# Altium PCB ESC.PcbDoc
Units mm, origin at the board's own origin, x right, y up, seen from the top; angles counter-clockwise.
Board outline 52.2 x 30.2 mm, 4 copper layers (Top Layer, Layer 1, Layer 2, Bottom Layer), stack 0.602 mm thick; 62 components, 53 nets, 202 pads, 167 vias.
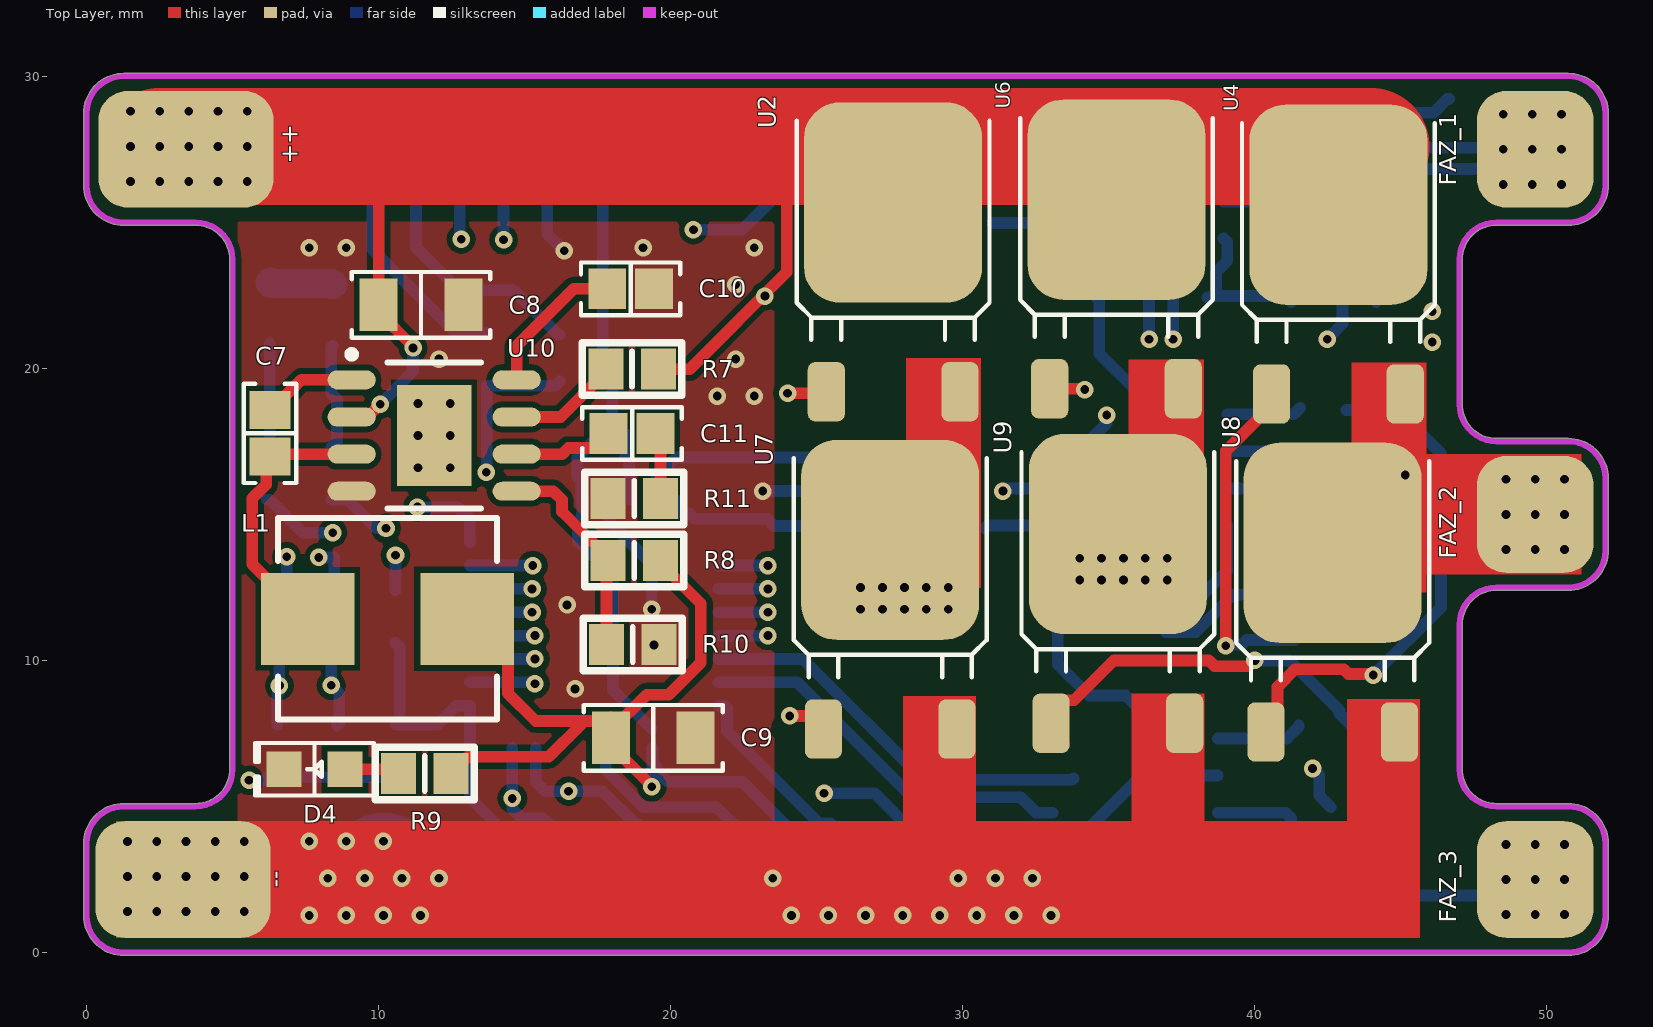
[diagram p0: Top Layer view]
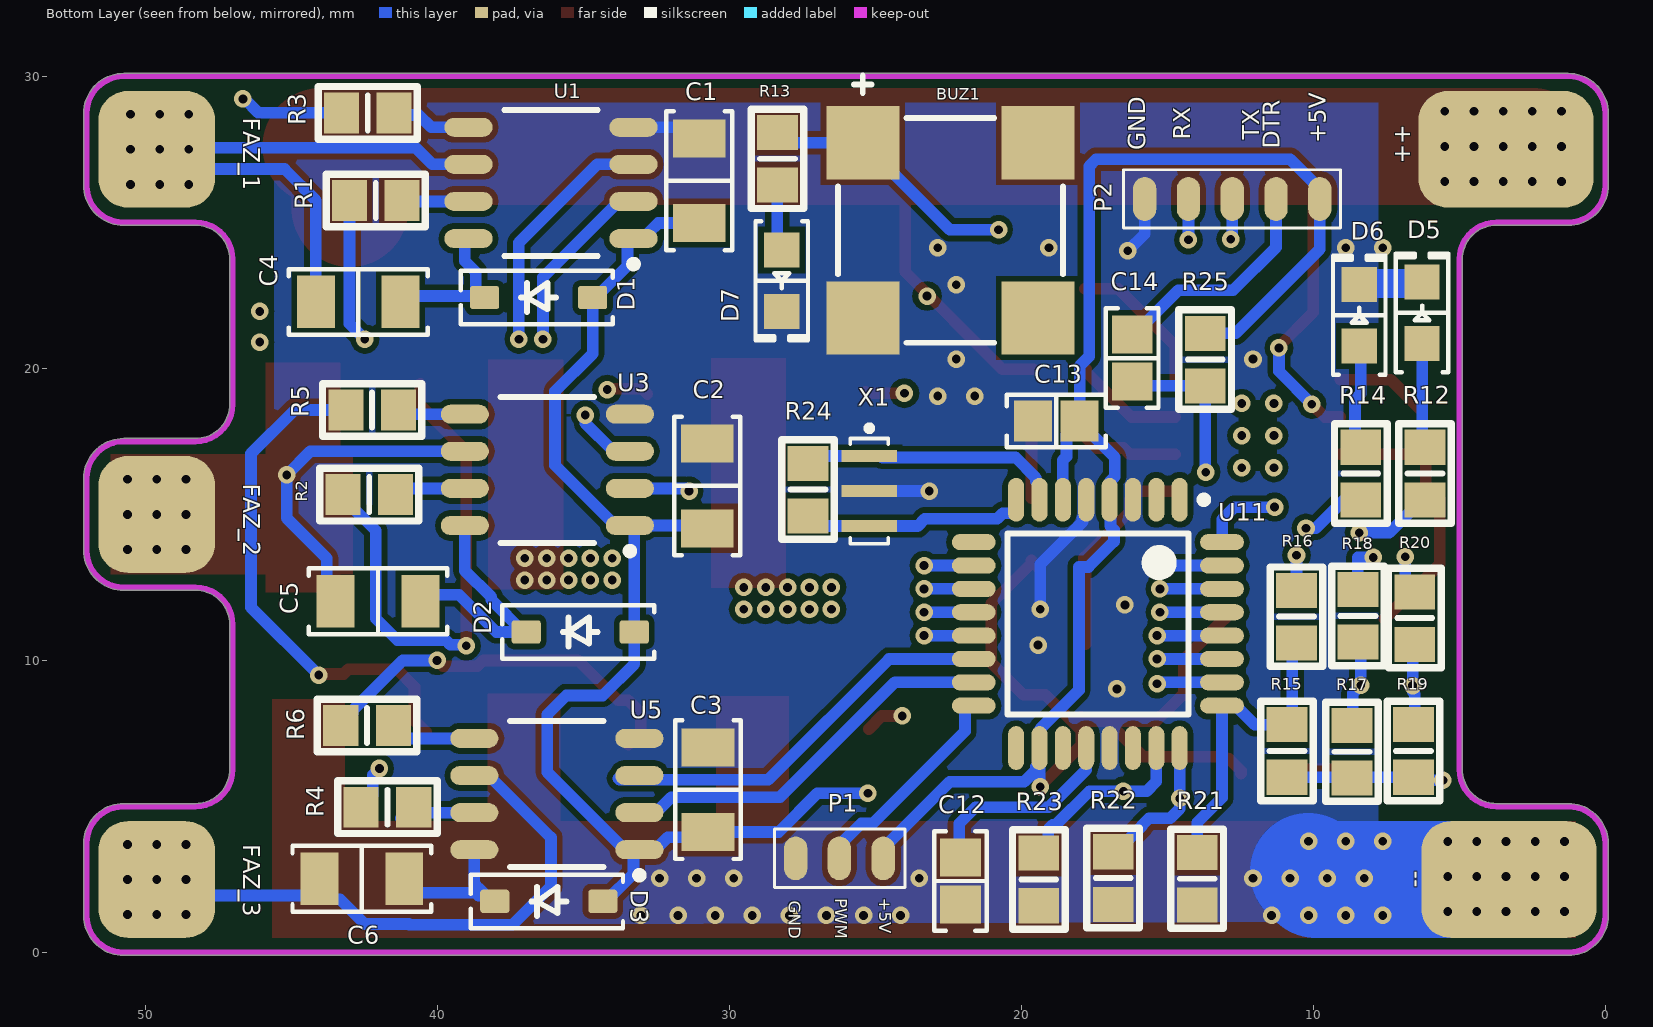
[diagram p1: Bottom Layer view, seen from below]
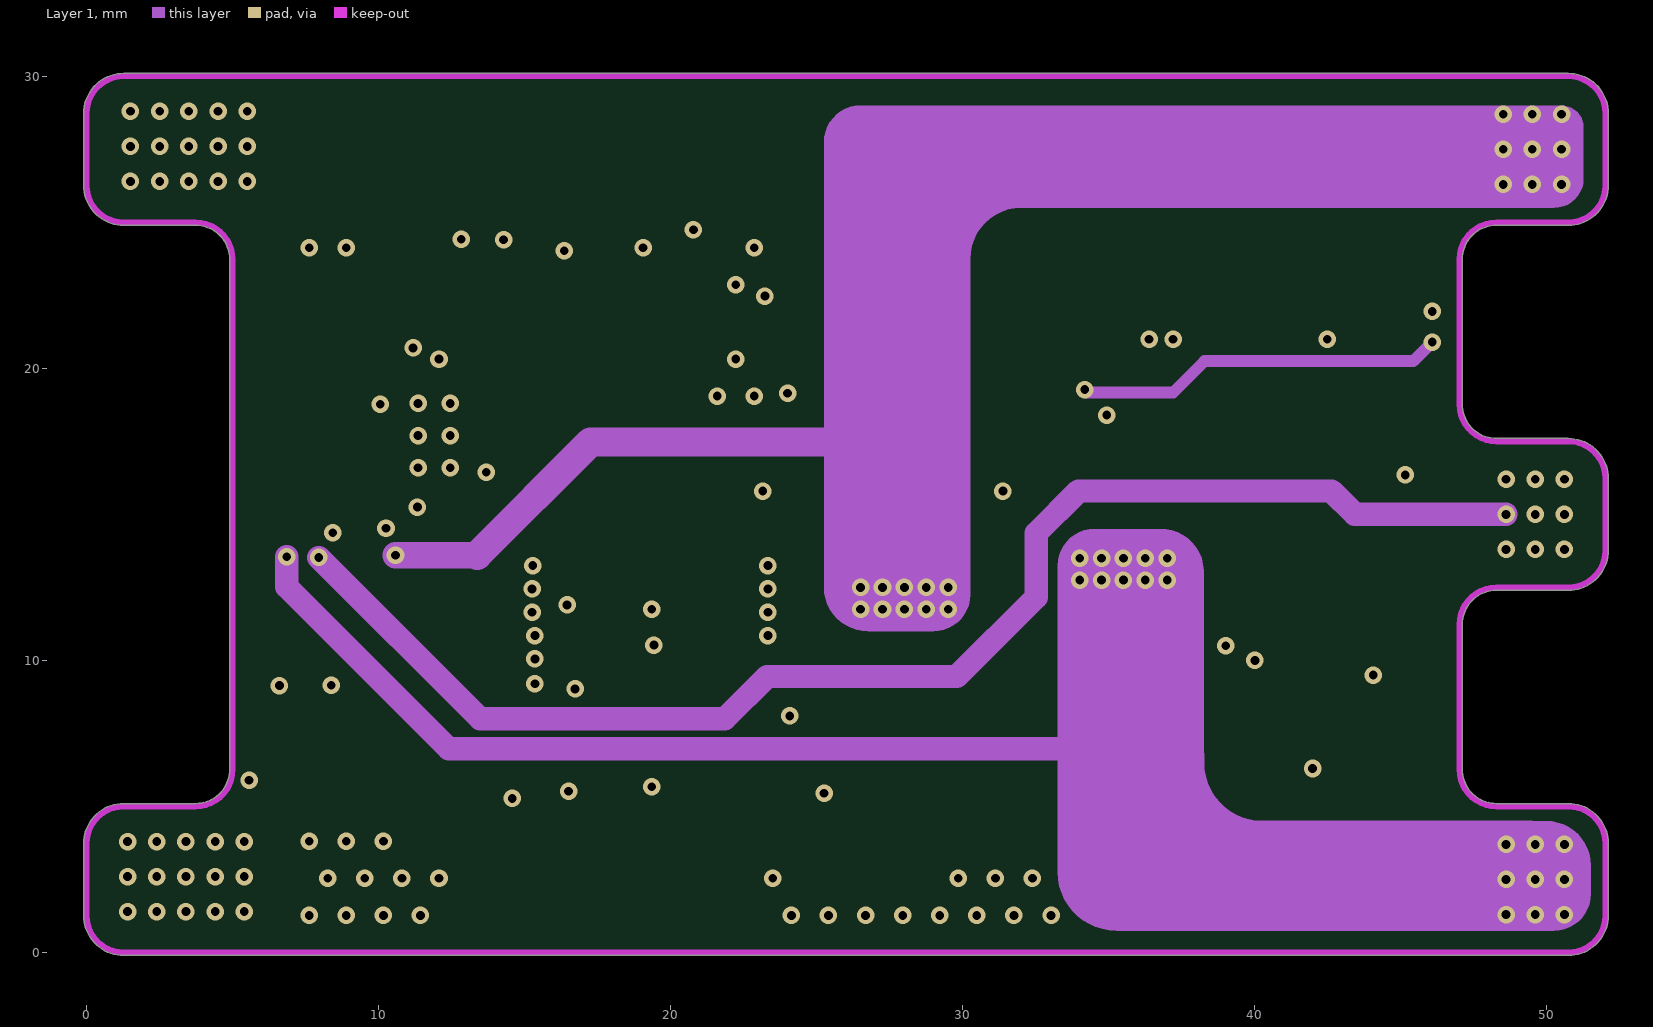
[diagram p2: Layer 1]
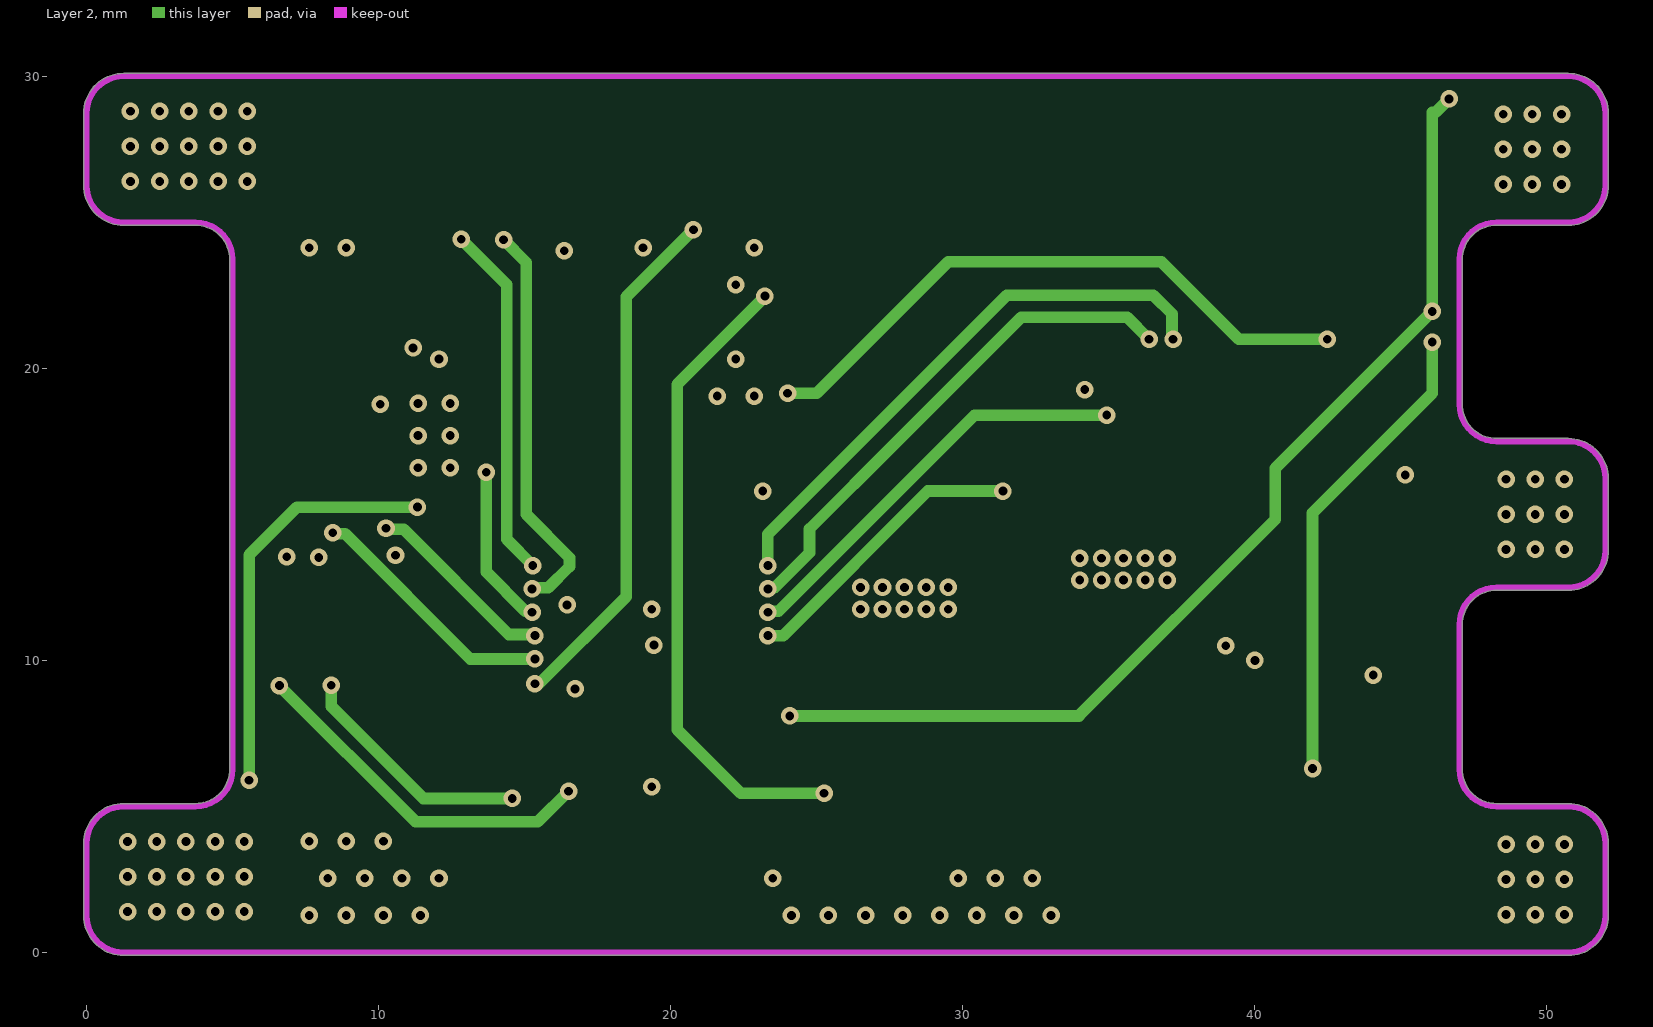
[diagram p3: Layer 2]
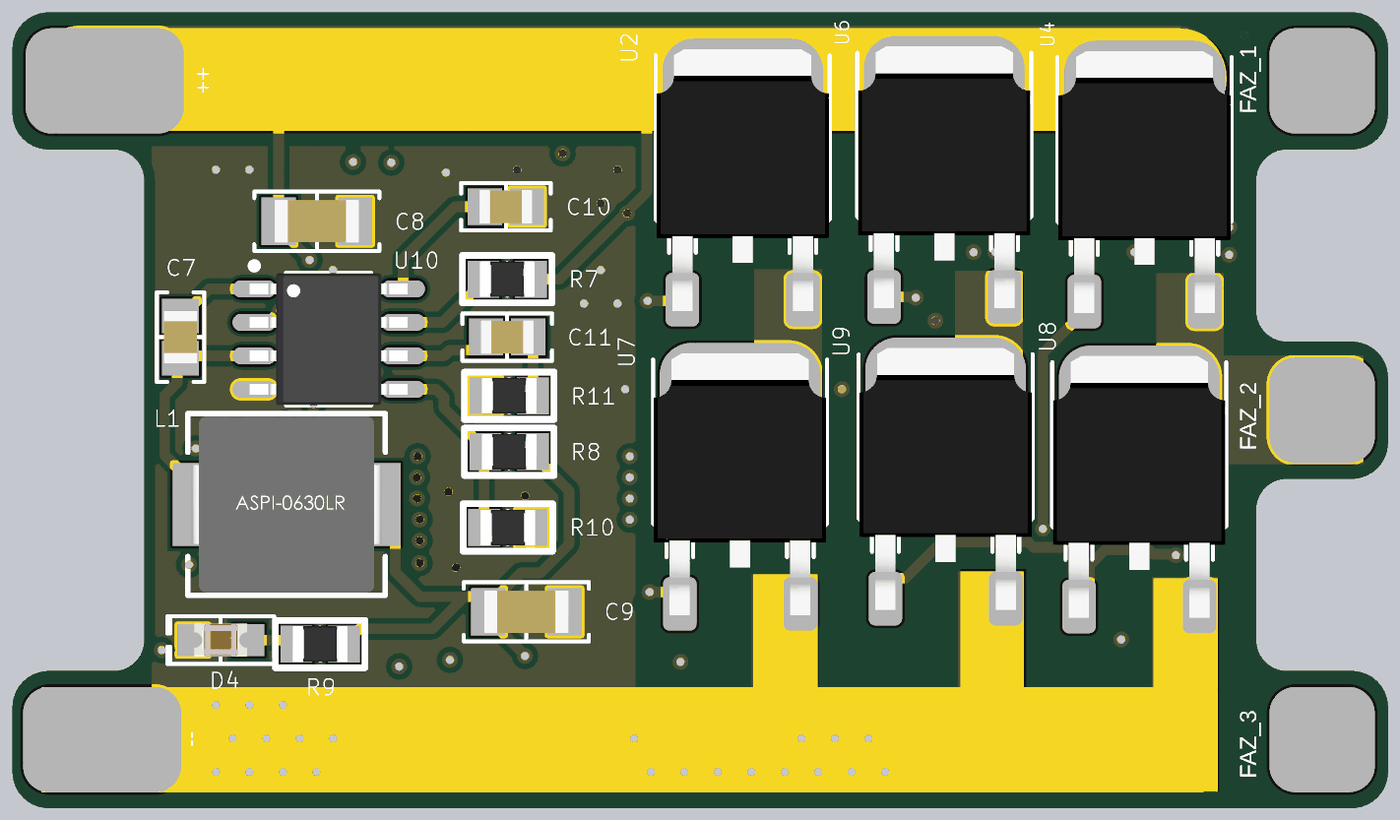
[diagram p4: 3D render of the assembled board from above, using the file's embedded part models]
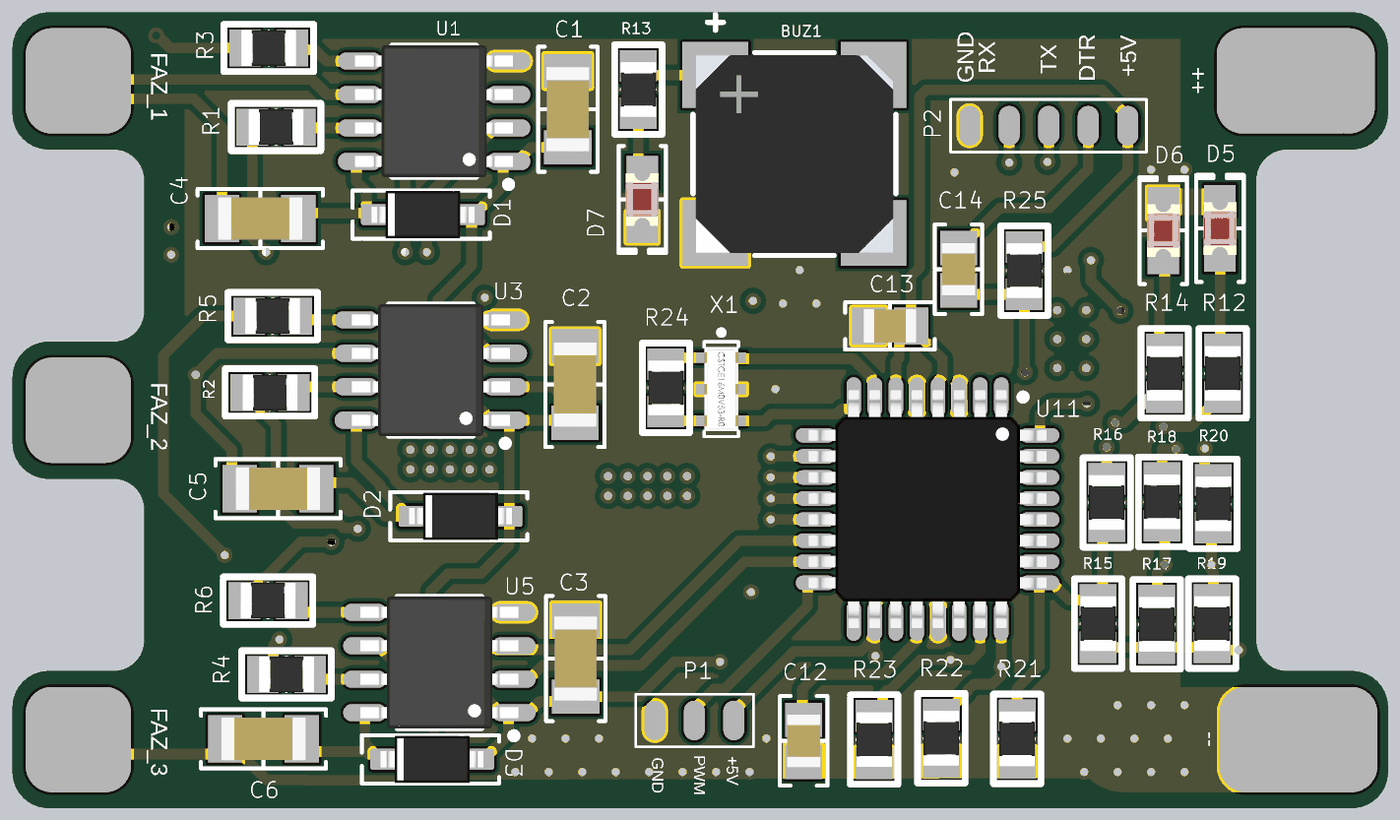
[diagram p5: 3D render of the assembled board from below, using the file's embedded part models]

## Layer stack, top to bottom
Top Solder: solder mask 0.0102, Solder Resist, Dk 3.5
Top Layer: signal copper 0.035
Dielectric 2: prepreg 0.0711, PP-006, Dk 4.1
Layer 1: signal copper 0.035
Dielectric 1: dielectric 0.32, FR-4, Dk 4.8
Layer 2: signal copper 0.035
Dielectric 3: prepreg 0.0711, PP-006, Dk 4.1
Bottom Layer: signal copper 0.035
Bottom Solder: solder mask 0.0102, Solder Resist, Dk 3.5

## Board outline
-0.1,1.27 -0.1,3.73 cw(c1.27,3.73) 1.27,5.1 3.73,5.1 ccw(c3.73,6.27) 4.9,6.27 4.9,23.73 ccw(c3.73,23.73) 3.73,24.9 1.27,24.9 cw(c1.27,26.27) -0.1,26.27 -0.1,28.73 cw(c1.27,28.73) 1.27,30.1 50.73,30.1 cw(c50.73,28.73) 52.1,28.73 52.1,26.27 cw(c50.73,26.27) 50.73,24.9 48.27,24.9 ccw(c48.27,23.73) 47.1,23.73 47.1,18.77 ccw(c48.27,18.77) 48.27,17.6 50.73,17.6 cw(c50.73,16.23) 52.1,16.23 52.1,13.77 cw(c50.73,13.77) 50.73,12.4 48.27,12.4 ccw(c48.27,11.23) 47.1,11.23 47.1,6.27 ccw(c48.27,6.27) 48.27,5.1 50.73,5.1 cw(c50.73,3.73) 52.1,3.73 52.1,1.27 cw(c50.73,1.27) 50.73,-0.1 1.27,-0.1 cw(c1.27,1.27)

## Design rules (kind name [scope] priority, off if disabled: settings)
Clearance [All] p1: gap=0.2 ignorepadtopadclearanceinfootprint=FALSE except(0: Arc-Hole Track-Hole SMDPad-Hole THPad-Hole Via-Hole Fill-Hole Poly-Hole Region-Hole Text-Hole)
PolygonConnect [All] p1: connectstyle=Direct reliefconductorwidth=0.3 reliefentries=4 polygonreliefangle="90 Angle" airgapwidth=0.3
RoutingVias [All] p1: holewidth=0.3 width=0.6 viastyle="Through Hole" minholewidth=0.25 minwidth=0.5 maxholewidth=2.5 maxwidth=5
SolderMaskExpansion [All] p1: expansion=0.102 istentingtop=FALSE
Width [All] p1: maxlimit=10 minlimit=0.1 preferedwidth=0.3 minimp=50.000000 maximp=50.000000 favimp=50.000000
30 further rules are at their usual default settings.

## Components (designator, comment, footprint, x,y, rotation, side; value= is the part's Value field where it differs from the comment)
BUZ1 "BUZZER MAGN 3.6V 7.5X7.5MM SMD" "BUZ: CMT-7525" 22.425,24.725 r270 bottom
C1 "CAP CER 10UF 50V X5R 1206" "CAP 1206/3216" 31.025,26.425 r270 bottom
C2 "CAP CER 10UF 50V X5R 1206" "CAP 1206/3216" 30.75,15.975 r270 bottom
C3 "CAP CER 10UF 50V X5R 1206" "CAP 1206/3216" 30.725,5.575 r270 bottom
C4 "CAP CER 2.2UF 50V X5R 1206" "CAP 1206/3216" 42.7,22.275 r180 bottom
C5 "CAP CER 2.2UF 50V X5R 1206" "CAP 1206/3216" 42.025,12.025 r180 bottom
C6 "CAP CER 2.2UF 50V X5R 1206" "CAP 1206/3216" 42.575,2.525 r180 bottom
C7 "CAP CER 10000PF 50V X7R 0805" "CAP 0805/2012" 6.275,17.775 r270 top
C8 "CAP CER 10UF 50V X5R 1206" "CAP 1206/3216" 11.45,22.175 r180 top
C9 "CAP CERAMIC 22UF 16V X7S 20% PAD" "CAP 1206/3216" 19.4,7.35 r180 top
C10 "CAP CER 0.1UF 50V X7R 0805" "CAP 0805/2012" 18.625,22.725 r180 top
C11 "CAP CER 3900PF 50V X7R 0805" "CAP 0805/2012" 18.675,17.775 r180 top
C12 "CAP CER 0.1UF 50V X7R 0805" "CAP 0805/2012" 22.075,2.45 r90 bottom
C13 "CAP CER 0.1UF 50V X7R 0805" "CAP 0805/2012" 18.8,18.2 r180 bottom
C14 "CAP CER 0.1UF 50V X7R 0805" "CAP 0805/2012" 16.2,20.352 r270 bottom
D1 "1N4148 Diyot" SOD-123 36.525,22.425 r0 bottom
D2 "1N4148 Diyot" SOD-123 35.1,10.975 r0 bottom
D3 "1N4148 Diyot" SOD-123 36.175,1.75 r0 bottom
D4 "Red 645nm LED Indication - Discrete 1.8V 0805" "SMD: LED 0805/2012 RED" 7.8,6.275 r180 top
D5 "Red 645nm LED Indication - Discrete 1.8V 0805" "SMD: LED 0805/2012 RED" 6.275,21.9 r90 bottom
D6 "Red 645nm LED Indication - Discrete 1.8V 0805" "SMD: LED 0805/2012 RED" 8.427,21.82 r90 bottom
D7 "Red 645nm LED Indication - Discrete 1.8V 0805" "SMD: LED 0805/2012 RED" 28.2,23 r270 bottom
L1 "FIXED IND 10UH 4A 68 MOHM SMD" ASPI-0630LR-100M-T15 10.3,11.425 r0 top
P1 "WR-PHD 2.54 mm Angled Socket Header" PWM_CONN 26.225,3.225 r0 bottom
P2 "WR-PHD 2.54 mm Angled Socket Header" TTL_CONN_5 12.775,25.8 r0 bottom
R1 "100" RES_0805 42.1,25.75 r0 bottom
R2 "100" RES_0805 42.325,15.675 r0 bottom
R3 "100" RES_0805 42.375,28.75 r0 bottom
R4 "100" RES_0805 41.7,4.975 r0 bottom
R5 "100" RES_0805 42.225,18.575 r0 bottom
R6 "100" RES_0805 42.4,7.775 r0 bottom
R7 "100K" RES_0805 18.675,19.975 r0 top
R8 "44.2K" RES_0805 18.75,13.425 r0 top
R9 "100" RES_0805 11.575,6.125 r0 top
R10 "10K" RES_0805 18.7,10.55 r180 top
R11 "6.8K" RES_0805 18.75,15.55 r0 top
R12 "100" RES_0805 6.175,16.4 r270 bottom
R13 "100" RES_0805 28.35,27.175 r90 bottom
R14 "100" RES_0805 8.375,16.4 r270 bottom
R15 "33K" RES_0805 10.9,6.9 r90 bottom
R16 "33K" RES_0805 10.575,11.5 r90 bottom
R17 "33K" RES_0805 8.675,6.875 r90 bottom
R18 "33K" RES_0805 8.475,11.525 r90 bottom
R19 "33K" RES_0805 6.575,6.9 r90 bottom
R20 "33K" RES_0805 6.525,11.45 r90 bottom
R21 "10K" RES_0805 13.975,2.525 r90 bottom
R22 "10K" RES_0805 16.85,2.55 r90 bottom
R23 "10K" RES_0805 19.4,2.5 r90 bottom
R24 "10K" RES_0805 27.3,15.85 r270 bottom
R25 "10K" RES_0805 13.7,20.3 r90 bottom
U1 "IC GATE DRVR HALF-BRIDGE 8SOIC" SOIC8 36.1,26.35 r0 bottom
U2 "MOSFET N-CH 30V 161A DPAK" DPAK 27.625,23.2 r90 top
U3 "IC GATE DRVR HALF-BRIDGE 8SOIC" SOIC8 36.225,16.525 r0 bottom
U4 "MOSFET N-CH 30V 161A DPAK" DPAK 42.875,23.125 r90 top
U5 "IC GATE DRVR HALF-BRIDGE 8SOIC" SOIC8 35.9,5.425 r0 bottom
U6 "MOSFET N-CH 30V 161A DPAK" DPAK 35.275,23.3 r90 top
U7 "MOSFET N-CH 30V 161A DPAK" DPAK 27.525,11.65 r90 top
U8 "MOSFET N-CH 30V 161A DPAK" DPAK 42.675,11.55 r90 top
U9 "MOSFET N-CH 30V 161A DPAK" DPAK 35.325,11.85 r90 top
U10 "IC REG BUCK ADJUSTABLE 3A 8SOIC" SOIC8_PAD 11.9,17.7 r0 top
U11 "IC MCU 8BIT 32KB FLASH 32TQFP" TQFP32 17.375,11.25 r270 bottom
X1 "CERAMIC RES 16.0000MHZ 15PF SMD" CRYSTAL_16MHZ(CTSE16) 25.2,15.8 r270 bottom

## Footprints (in the part's own frame and the unit in brackets; to place one, negate y for a bottom-side part, rotate by r counter-clockwise, add the part's x,y. Pads: shape width x height; smd on the part's side, far side on the other; paste and mask are expansions set on the pad)
ASPI-0630LR-100M-T15 [mm]
  rect 3.2x3.15 smd: 1(-2.725,0) 2(2.725,0)
  silkscreen extent -3.75,-3.45 3.75,3.45, body extent -3.6,-3.32 3.6,3.33, height 3
"BUZ: CMT-7525" [mm]
  rect 2.5x2.5 smd: 0(-3,3) 0(3,3) 1(-3,-3) 2(3,-3)
  silkscreen extent -5.3,-3.85 3.85,3.85, body extent -3.75,-3.75 3.75,3.75, height 2.5
"CAP 0805/2012" [mm] "Chip Capacitor, 2-Leads, Body 2.00x1.20mm, IPC Medium Density"
  rect 1.3x1.4 smd: 1(-0.8,0) 2(0.8,0)
  silkscreen extent -1.7,-0.9 1.7,0.9, body extent -1,-0.64 1,0.64, height 1.26
"CAP 1206/3216" [mm] "Chip Capacitor, 2-Leads, Body 3.25x1.60mm, IPC Medium Density"
  rect 1.3x1.8 smd: 1(-1.45,0) 2(1.45,0)
  silkscreen extent -2.37,-1.12 2.37,1.12, body extent -1.6,-0.81 1.6,0.81, height 1.62
CRYSTAL_16MHZ(CTSE16) [mm]
  rect 0.4x1.9 smd: 1(-1.2,0) 2(0,0) 3(1.2,0)
  silkscreen extent -2.25,-0.65 1.8,0.65, body extent -1.6,-0.65 1.6,0.65, height 0.9
DPAK [mil] "D-PAK, 3-Pads, Body 6,47x6,54mm (max), IPC Medium Density"
  rrect40% 80x50 smd: 1(-157.48,90.55) 3(-157.48,-89.45)
  rrect40% 270x240 smd: 4(97.52,0.55)
  silkscreen extent -87,-129 208,131, body extent -174,-128 217,129, height 91
PWM_CONN [mm]
  oval 0.8x1.5 smd: 1(-1.5,0) 2(0,0) 3(1.5,0)
  silkscreen extent -2.25,-1 2.22,1
RES_0805 [mm]
  rect 1.2x1.4 smd: 1(-0.9,0) 2(0.9,0)
  silkscreen extent -1.7,-0.9 1.7,0.9, body extent -1.05,-0.67 1.05,0.68, height 0.6
"SMD: LED 0805/2012 RED" [mm] "Chip Diode, 2-Leads, Body 2.00x1.25mm, IPC Medium Density"
  rect 1.2x1.2 smd: 1(-1.05,0) 2(1.05,0)
  silkscreen extent -2.03,-0.9 2.03,0.9, body extent -1,-0.62 1,0.63, height 0.9
SOD-123 [mm] "SOD, 2-Leads, Body 1.55x3.70mm, IPC Medium Density"
  rrect25% 1x0.8 smd: 1(-1.85,0) 2(1.85,0)
  silkscreen extent -2.54,-0.92 2.67,0.92, body extent -1.95,-0.9 1.95,0.9, height 1.18
SOIC8 [mm] "SOIC, 8-Leads, Body 4,90x3,90mm, Pitch 1,27mm, Thermal Pad 3,45x2,56mm, IPC Low Density"
  oval 1.65x0.65 smd: 1(-2.825,1.905) 2(-2.825,0.635) 3(-2.825,-0.635) 4(-2.825,-1.905) 5(2.825,-1.905) 6(2.825,-0.635) 7(2.825,0.635) 8(2.825,1.905)
  silkscreen extent -2.95,-2.5 1.6,2.9, body extent -3,-2.5 3,2.5, height 1.7
SOIC8_PAD [mm] "SOIC, 8-Leads, Body 4,90x3,90mm, Pitch 1,27mm, Thermal Pad 3,45x2,56mm, IPC Low Density"
  oval 1.65x0.65 smd: 1(-2.825,1.905) 2(-2.825,0.635) 3(-2.825,-0.635) 4(-2.825,-1.905) 5(2.825,-1.905) 6(2.825,-0.635) 7(2.825,0.635) 8(2.825,1.905)
  rect 2.56x3.45 smd: 9(0,0)
  silkscreen extent -2.95,-2.5 1.6,2.9, body extent -3,-2.5 3,2.5, height 1.7
TQFP32 [mm] "TQFP, 32-Leads, Body 7,00x7,00mm, Pitch 0,80mm, IPC Medium Density"
  oval 1.5x0.55 smd: 1(-4.25,2.8) 2(-4.25,2) 3(-4.25,1.2) 4(-4.25,0.4) 5(-4.25,-0.4) 6(-4.25,-1.2) 7(-4.25,-2) 8(-4.25,-2.8) 17(4.25,-2.8) 18(4.25,-2) 19(4.25,-1.2) 20(4.25,-0.4) 21(4.25,0.4) 22(4.25,1.2) 23(4.25,2) 24(4.25,2.8)
  oval 0.55x1.5 smd: 9(-2.8,-4.25) 10(-2,-4.25) 11(-1.2,-4.25) 12(-0.4,-4.25) 13(0.4,-4.25) 14(1.2,-4.25) 15(2,-4.25) 16(2.8,-4.25) 25(2.8,4.25) 26(2,4.25) 27(1.2,4.25) 28(0.4,4.25) 29(-0.4,4.25) 30(-1.2,4.25) 31(-2,4.25) 32(-2.8,4.25)
  silkscreen extent -4.37,-3.1 3.1,3.75, body extent -4.51,-4.51 4.51,4.51, height 1
TTL_CONN_5 [mm]
  oval 0.8x1.5 smd: 1(-3,0) 2(-1.5,0) 3(0,0) 4(1.5,0) 5(3,0)
  silkscreen extent -3.71,-1 3.72,1

## Part data
BUZ1: library part Buzzer(CMT-7525-80-SMT-TR), "Buzzers Transducer, Externally Driven Magnetic 3.6V 100mA 2.73kHz 80dB @ 3.6V, 10cm Surface Mount Solder Pads", +Sicaklik=+85, -Sicaklik=-40, Cins=Buzzer, Deger=Buzzer, Kılıf=Nonstandard, Lehim Yöntemi=SMD, MSL="1 (Unlimited)", Uretici Kodu=CMT-7525-80-SMT-TR
C1 C2 C3 C8: library part "10uF 50V 1206", "10µF ±10% 50V Ceramic Capacitor X5R 1206 (3216 Metric)", +Sicaklik=+125, -Sicaklik=-55, Cins=Kondansator, Deger="10uF 50V", Kılıf=1206, Lehim Yöntemi=SMD, MSL="1 (Unlimited)", Uretici Kodu=CL31A106KBHNNNE
C4 C5 C6: library part "2.2uF 50V 1206", "2.2µF ±10% 50V Ceramic Capacitor X5R 1206 (3216 Metric)", +Sicaklik=+85, -Sicaklik=-55, Cins=Kondansator, Deger="2.2uF 50V", Kılıf=1206, Lehim Yöntemi=SMD, MSL="1 (Unlimited)", Uretici Kodu=CL31A225KBHNNNE
C7: library part "10nF 50V 0805", "10000pF ±10% 50V Ceramic Capacitor X7R 0805 (2012 Metric)", +Sicaklik=+125, -Sicaklik=-55, Cins=Kondansator, Deger="10nF 50V", Kılıf=0805, Lehim Yöntemi=SMD, MSL="1 (Unlimited)", Uretici Kodu=CL21B103KBANNNC
C9: library part "22uF 16V 1206", "22µF ±20% 16V Ceramic Capacitor X7S 1206 (3216 Metric)", +Sicaklik=+125, -Sicaklik=-55, Cins=Kondansator, Deger="22uF 16V", Kılıf=1206, Lehim Yöntemi=SMD, MSL="1 (Unlimited)", Uretici Kodu=GRM31CC71C226ME11L
C10 C12 C13 C14: library part "100nF 50V 0805", "0.1µF ±10% 50V Ceramic Capacitor X7R 0805 (2012 Metric)", +Sicaklik=+125, -Sicaklik=-55, Cins=Kondansator, Deger="100nF 50V", Kılıf=0805, Lehim Yöntemi=SMD, MSL="1 (Unlimited)", Uretici Kodu=CL21B104KBCNNNC
C11: library part "3.9nF 50V 0805", "3900pF ±10% 50V Ceramic Capacitor X7R 0805 (2012 Metric)", +Sicaklik=+125, -Sicaklik=-55, Cins=Kondansator, Deger="3.9nF 50V", Kılıf=0805, Lehim Yöntemi=SMD, MSL="1 (Unlimited)", Uretici Kodu=CL21B392KBANNNC
D1 D2 D3: library part 1N4148, "DIODE GEN PURP 100V 150MA SOD123", +Sicaklik=+150, -Sicaklik=-65, Cins=Diyot, Deger=1N4148, Kılıf=SOD123, Lehim Yöntemi=SMD, MSL="1 (Unlimited)", Uretici Kodu=1N4148W-TP
D4 D5 D6 D7: library part LED_Kırmızı, "LED RED DIFFUSED 0805 SMD", +Sicaklik=+125, -Sicaklik=-40, Cins=LED, Deger="KIRMIZI LED", Kılıf=0805, Lehim Yöntemi=SMD, MSL="1 (Unlimited)", Uretici Kodu="LH R974-LP-1"
L1: library part "10uH 4A", "10µH Shielded Molded Inductor 4A 68mOhm Max Nonstandard", +Sicaklik=+125, -Sicaklik=-55, Cins=Bobin, Deger="10uH 4A", Kılıf=Nonstandard, Lehim Yöntemi=SMD, MSL="1 (Unlimited)", Uretici Kodu=ASPI-0630LR-100M-T15
P1: library part HDR(1X3), +Sicaklik=+105, -Sicaklik=-40, Cins=Konnektor, Kılıf="3POS 2.54MM", Lehim Yöntemi=MANUEL, MSL="1 (Unlimited)", Uretici Kodu=613003143121
P2: library part HDR(1X5), +Sicaklik=+105, -Sicaklik=-40, Cins=Konnektor, Kılıf="5POS 2.54MM", Lehim Yöntemi=MANUEL, MSL="1 (Unlimited)", Uretici Kodu=613005143121
R1 R2 R3 R4 R5 R6 R9 R12 R13 R14: library part "100R 0805", "100 Ohms ±1% 0.125W, 1/8W Chip Resistor 0805 (2012 Metric) Moisture Resistant Thick Film", +Sicaklik=+155, -Sicaklik=-55, Cins=Direnc, Deger=100R, Kılıf=0805, Lehim Yöntemi=SMD, MSL="1 (Unlimited)", Uretici Kodu=RC0805FR-07100RL
R7: library part "100K 0805", "100 kOhms ±1% 0.125W, 1/8W Chip Resistor 0805 (2012 Metric) Moisture Resistant Thick Film", +Sicaklik=+155, -Sicaklik=-55, Cins=Direnc, Deger=100K, Kılıf=0805, Lehim Yöntemi=SMD, MSL="1 (Unlimited)", Uretici Kodu=RC0805FR-07100KL
R8: library part "44.2K 0805", "44.2 kOhms ±1% 0.125W, 1/8W Chip Resistor 0805 (2012 Metric) Moisture Resistant Thick Film", +Sicaklik=+155, -Sicaklik=-55, Cins=Direnc, Deger=44.2K, Kılıf=0805, Lehim Yöntemi=SMD, MSL="1 (Unlimited)", Uretici Kodu=RC0805FR-0744K2L
R10 R21 R22 R23 R24 R25: library part "10K 0805", "10 kOhms ±1% 0.125W, 1/8W Chip Resistor 0805 (2012 Metric) Moisture Resistant Thick Film", +Sicaklik=+155, -Sicaklik=-55, Cins=Direnc, Deger=10K, Kılıf=0805, Lehim Yöntemi=SMD, MSL="1 (Unlimited)", Uretici Kodu=RC0805FR-0710KL
R11: library part "6.8K 0805", "6.8 kOhms ±1% 0.125W, 1/8W Chip Resistor 0805 (2012 Metric) Moisture Resistant Thick Film", +Sicaklik=+155, -Sicaklik=-55, Cins=Direnc, Deger=6.8K, Kılıf=0805, Lehim Yöntemi=SMD, MSL="1 (Unlimited)", Uretici Kodu=RC0805FR-076K8L
R15 R16 R17 R18 R19 R20: library part "33K 0805", "33 kOhms ±1% 0.125W, 1/8W Chip Resistor 0805 (2012 Metric) Moisture Resistant Thick Film", +Sicaklik=+155, -Sicaklik=-55, Cins=Direnc, Deger=33K, Kılıf=0805, Lehim Yöntemi=SMD, MSL="1 (Unlimited)", Uretici Kodu=RC0805FR-0733KL
U1 U3 U5: library part IR2101, "Half-Bridge Gate Driver IC Non-Inverting 8-SOIC", +Sicaklik=+150, -Sicaklik=-40, Cins=IC, Deger=IR2101STRPBF, Kılıf=8-SOIC, Lehim Yöntemi=SMD, MSL="2A (4 Weeks)", Uretici Kodu=IR2101STRPBF
U2 U4 U6 U7 U8 U9: library part IRLR7843, "N-Channel 30V 161A (Tc) 140W (Tc) Surface Mount D-Pak", +Sicaklik=+175, -Sicaklik=-55, Cins=MOSFET, Deger=IRLR7843TRPBF, Kılıf=DPAK(TO-252-3), Lehim Yöntemi=SMD, MSL="1 (Unlimited)", Uretici Kodu=IRLR7843TRPBF
U10: library part MP2307DN, "Buck Switching Regulator IC Positive Adjustable 0.925V 1 Output 3A 8-SOIC (0.154\", 3.90mm Width) Exposed Pad", +Sicaklik=+85, -Sicaklik=-40, Cins=IC, Deger=MP2307DN, Kılıf=8-SOIC, Lehim Yöntemi=SMD, MSL="2A (4 Weeks)", Uretici Kodu=MP2307DN-LF-Z
U11: library part ATMEGA328P, "AVR AVR® ATmega Microcontroller IC 8-Bit 20MHz 32KB (16K x 16) FLASH 32-TQFP (7x7)", +Sicaklik=+85, -Sicaklik=-40, Cins=IC, Deger=ATMEGA328P, Kılıf=32-TQFP, Lehim Yöntemi=SMD, MSL="3 (168 Hours)", Uretici Kodu=RC0805FR-07100RL
X1: library part "CRYSTAL 16.0000MHZ(CSTCE16M0V53-R0)", "16MHz Ceramic Resonator Built in Capacitor 15pF ±0.3%  -20°C ~ 80°C Surface Mount", +Sicaklik=+80, -Sicaklik=-20, Cins=Kristal, Deger="16 MHZ 15PF", Kılıf=3-SMD, Lehim Yöntemi=SMD, MSL="1 (Unlimited)", Uretici Kodu=CSTCE16M0V53-R0

## Free pads (board coordinates)
  rrect50% 6x4 smd: ""(3.3,2.5) ""(3.4,27.5)
  rrect50% 6x4 smd far side: ""(3.3,2.5) ""(3.4,27.5)
  rrect50% 4x4 smd: ""(49.6,2.5) ""(49.6,15) ""(49.6,27.5)
  rrect50% 4x4 smd far side: ""(49.6,2.5) ""(49.6,15) ""(49.6,27.5)

## Via types
v1: diameter 0.6, hole 0.3, Top Layer to Bottom Layer, tented both sides, 166 vias
v2: diameter 0.6, hole 0.3, Layer 2 to Bottom Layer, tented both sides, 1 vias

## Nets (pads, with @x,y where several pads share a name; then routed paths per layer and width w, separated by ;. In a path a pad name is that pad's centre, name@x,y a point inside that pad or via, vN(x,y) a via of type N, cw(c..) or ccw(c..) an arc to the next point about the centre after c; other vN are vias at no path point)
+5V: C9.2 C13.2 L1.2 P1.1 P2.1 R8.2 R9.2 R25.2 U11.4 U11.6 U11.18 | length 72.4
  Top Layer w0.4: R9.2 12.475,6.225 12.875,6.625 12.975,6.625 13.05,6.7 15.825,6.7 16.913,7.788 ; L1.2 13.05,11.425 14.425,10.05 14.425,8.875 15.375,7.925 17.825,7.925 17.95,8.05 C9.2@17.95,7.6 ; v1(19.35,5.675) 19.35,5.7 17.95,7.1 C9.2 C9.2@17.95,7.6 ; R8.2@19.35,13.125 R8.2 19.65,13.325 21.025,11.95 21.025,9.925 19.925,8.825 19.175,8.825 C9.2@17.95,7.6
  Bottom Layer w0.4: R25.2 12.65,21.2 9.775,24.075 P2.1 9.775,26.15 10.784,27.159 17.441,27.159 17.675,26.925 17.675,20.409 18,20.084 C13.2 ; U11.6 18.575,16.85 18.45,16.975 18.45,17.75 C13.2 ; U11.18@19.346,7.658 18.025,8.98 18.025,13.2 17.7,13.2 16.825,14.075 16.825,14.48 16.946,14.601 16.946,14.956 16.975,14.984 U11.4 16.946,15.529 16.946,16.142 16.803,16.285 16.803,16.953 18,18.15 C13.2 ; v1(19.35,5.675) 19.363,5.688 19.363,6.987 U11.18 19.375,6.484 19.5,6.359 19.5,6.245 19.895,5.85 22.45,5.85 24.725,3.575 P1.1
A0: R19.2 R20.1 R23.2 U11.23 | length 22
  Layer 2 w0.4: v1(6.6,9.138) 11.263,4.475 15.45,4.475 v1(16.5,5.525)
  Bottom Layer w0.4: R20.1@6.175,10.6 6.6,10.175 v1(6.6,9.138) 6.6,8.925 6.525,8.85 R19.2@6.525,7.8 ; U11.23 15.375,5.853 15.703,5.525 v1(16.5,5.525) 17.662,5.525 18.812,4.375 18.922,4.375 19.075,4.222 19.075,3.725 R23.2 ; R23.2@19.6,3.6 19.7,3.5 R23.2@19.7,3.4
A1: R17.2 R18.1 R22.2 U11.24 | length 16.2
  Layer 2 w0.4: v1(8.375,9.148) 8.375,8.425 11.525,5.275 v1(14.575,5.275)
  Bottom Layer w0.4: R18.1@8.375,10.6 v1(8.375,9.148) 8.65,8.873 8.65,7.85 R17.2@8.575,7.775 ; U11.24 v1(14.575,5.275) 14.575,4.925 14.9,4.6 15.625,4.6 15.859,4.366 15.859,4.341 16.75,3.45 R22.2
A2: R15.2 R16.1 R21.2 U11.25 | length 11.1
  Bottom Layer w0.4: R15.2@10.575,7.8 12,7.8 12.65,8.45 U11.25 13.125,5.3 13.975,4.45 R21.2 ; R16.1 10.725,10.45 10.725,7.825 R15.2@10.75,7.8
BUZZ: BUZ1.1 R13.2 U11.26 | length 29.1
  Layer 2 w0.4: v1(15.35,9.2) 15.49,9.2 18.475,12.185 18.475,22.45 v1(20.775,24.75)
  Bottom Layer w0.4: U11.26 v1@15.35,9.25 ; v1(20.775,24.75) 22.45,24.75 BUZ1.1 28,27.725 R13.2
DTR: C14.1 P2.2 | length 7.8
  Bottom Layer w0.4: P2.2 11.275,24.15 12.75,22.675 14.627,22.675 16.15,21.152 C14.1
FAZ_1: C4.1 pad.@49.6,27.5 R16.2 U1.6 U2.3 U7.4 | length 39.5
  Layer 1 w0.9: v1(10.575,13.6) 13.375,13.6
  Layer 1 w1: 13.375,13.6 17.25,17.475 26.775,17.475
  Bottom Layer w0.4: R16.2 v1(10.575,13.6) ; U1.6 40.169,26.985 40.734,27.55 48.125,27.55 48.175,27.5 v1(48.5,27.5) v1(49.5,27.5) ; C4.1@44.175,22.3 C4.1 44.15,25.75 45.225,26.825 48.925,26.825 pad.@49.6,27.5
  other v1: 26.5,11.75 27.25,11.75 28,11.75 28.75,11.75 29.5,11.75 26.5,12.5 27.25,12.5 28,12.5 28.75,12.5 29.5,12.5 48.5,26.3 49.5,26.3 50.5,26.3 50.5,27.5 48.5,28.7 49.5,28.7 50.5,28.7
FAZ_2: C5.1 pad.@49.6,15 R18.2 U3.6 U4.3 U8.4 | length 63.2
  Layer 1 w0.8: v1(7.95,13.525) 13.475,8 21.85,8 23.3,9.45 29.794,9.45 32.513,12.169 32.513,14.35 33.963,15.8 42.625,15.8 43.425,15 v1(48.6,15)
  Bottom Layer w0.4: v1(7.95,13.525) 8.475,13.525 R18.2 ; U3.6 44.34,17.16 v1(45.15,16.35) 45.15,14.875 43.775,13.5 C5.1@43.775,12.05 ; pad.@48,16.3 49.3,15 v1(48.6,15)
  other v1: 48.6,13.8 49.6,13.8 50.6,13.8 49.6,15 50.6,15 48.6,16.2 49.6,16.2 50.6,16.2
FAZ_3: C6.1 pad.@49.6,2.5 R20.2 U5.6 U6.3 U9.4 | length 54.4
  Layer 1 w0.8: v1(6.85,13.55) 6.85,12.525 12.4,6.975 34.5,6.975 34.534,7.009 34.866,7.009 35.125,6.75 36.35,6.75
  Bottom Layer w0.4: R20.2 6.85,12.675 v1(6.85,13.55) ; U5.6 38.225,6.06 36.1,3.935 36.1,2.268 37.418,0.95 40.95,0.95 40.975,0.975 42.475,0.975 43.325,1.825 43.575,1.825 43.825,2.075 44.025,2.275 C6.1 ; C6.1@43.95,1.95 47.861,1.95 48.375,2.464 pad.@48.375,2.5 ; v1(48.6,2.5) v1(49.6,2.5)
  other v1: 48.6,1.3 49.6,1.3 50.6,1.3 50.6,2.5 48.6,3.7 49.6,3.7 50.6,3.7 34,12.75 34.75,12.75 35.5,12.75 36.25,12.75 37,12.75 34,13.5 34.75,13.5 35.5,13.5 36.25,13.5 37,13.5
GND: BUZ1.2 C1.1 C2.1 C3.1 C8.1 C9.1 C10.1 C12.1 C13.1 D4.2 D5.2 D6.2 D7.2 P1.3 P2.5 pad.@3.3,2.5 R10.1 R11.1 R21.1 R22.1 R23.1 U1.4 U3.4 U5.4 U7.3 U8.3 U9.3 U10.4 U11.3 U11.5 U11.21 X1.2 | length 20
  Bottom Layer w0.4: P2.5 15.775,24.6 v1(16.35,24.025) ; U11.5 17.775,14.984 17.9,14.859 17.9,14.745 19.35,13.295 v1(19.35,11.75) ; v1(23.15,15.8) X1.2 ; C1.1 31.405,28.255 U1.4
  Bottom Layer w1: D5.2 6.315,22.91 8.387,22.91 D6.2
  Bottom Layer w4: pad.@3.3,2.5 9.9,2.5 10.175,2.775
  other v1: 7.62,1.27 8.89,1.27 10.16,1.27 11.43,1.27 24.13,1.27 25.4,1.27 26.67,1.27 27.94,1.27 29.21,1.27 30.48,1.27 31.75,1.27 33.02,1.27 1.4,1.4 2.4,1.4 3.4,1.4 4.4,1.4 5.4,1.4 8.255,2.54 9.525,2.54 10.795,2.54 12.065,2.54 23.495,2.54 29.845,2.54 31.115,2.54 32.385,2.54 1.4,2.6 2.4,2.6 3.4,2.6 4.4,2.6 5.4,2.6 1.4,3.8 2.4,3.8 3.4,3.8 4.4,3.8 5.4,3.8 7.62,3.81 8.89,3.81 10.16,3.81 16.725,9.025 19.425,10.525 16.45,11.9 21.59,19.05 22.86,19.05 12.065,20.32 22.225,20.32 22.225,22.86 7.62,24.13 8.89,24.13 19.05,24.13 22.86,24.13
H_1: U1.2 U11.11 | length 25.7
  Layer 2 w0.4: v1(23.325,12.45) 23.363,12.488 23.553,12.488 24.75,13.685 24.75,14.5 27.75,17.5 32,21.75 35.625,21.75 v1(36.375,21)
  Bottom Layer w0.4: U11.11 v1(23.325,12.45) ; U1.2 33.775,25.715 36.375,23.115 v1(36.375,21)
H_2: U3.2 U11.13 | length 13.9
  Layer 2 w0.4: v1(23.325,10.85) 23.85,10.85 28.8,15.8 v1(31.375,15.8)
  Bottom Layer w0.4: U11.13 v1(23.325,10.85) ; v1(31.375,15.8) 31.465,15.89 U3.2
H_3: U5.2 U11.15 | length 13.3
  Bottom Layer w0.4: U11.15 24.325,9.25 28.263,5.312 31.985,5.312 32.507,4.79 U5.2
L_1: U1.3 U11.10 | length 29.5
  Layer 2 w0.4: v1(23.325,13.25) 23.325,14.325 31.5,22.5 36.525,22.5 37.162,21.863 37.162,21.038 v1(37.2,21)
  Bottom Layer w0.4: U11.10 v1(23.325,13.25) ; U1.3 34.517,26.985 37.2,24.302 v1(37.2,21)
L_2: U3.3 U11.12 | length 18.3
  Layer 2 w0.4: v1(23.325,11.65) 23.363,11.688 23.688,11.688 30.4,18.4 v1(34.925,18.4)
  Bottom Layer w0.4: U11.12 v1(23.325,11.65) ; U3.3 33.96,17.16 34.925,18.125 v1(34.925,18.4)
L_3: U5.3 U11.14 | length 13.9
  Bottom Layer w0.4: U11.14 24.525,10.05 28.663,5.912 33.075,5.912 33.752,5.912 U5.3@33.8,5.96
LED_1: R12.2 U11.27 | length 13.7
  Layer 2 w0.4: v1(8.425,14.375) 8.463,14.337 8.848,14.337 13.135,10.05 v1(15.35,10.05)
  Bottom Layer w0.4: R12.2 6.275,15.5 7.4,14.375 v1(8.425,14.375) ; U11.27 v1(15.35,10.05)
LED_2: R14.2 U11.28 | length 11.1
  Layer 2 w0.4: v1(10.25,14.525) 10.288,14.487 10.859,14.487 14.458,10.888 15.312,10.888 v1(15.35,10.85)
  Bottom Layer w0.4: R14.2 8.94,15.5 9.915,14.525 v1(10.25,14.525) ; U11.28 v1(15.35,10.85)
NetC4_2: C4.2 D1.2 U1.8 | length 5.1
  Bottom Layer w0.4: D1.2 38.475,22.425 38.675,22.625 38.675,23.3 39.05,23.675 39.05,24.33 38.935,24.445 U1.8 ; D1.2@38.675,22.475 41.05,22.475 C4.2
NetC5_2: C5.2 D2.2 U3.8 | length 9
  Bottom Layer w0.4: D2.2 D2.2@37.05,10.975 ; U3.8 39.05,13.075 38.15,12.175 38.15,12.075 D2.2@37.05,10.975 ; C5.2@40.875,12.05 40.85,12.025 C5.2 40.35,12.25 39.25,12.25 37.975,10.975 D2.2@37.05,10.975
NetC6_2: C6.2 D3.2 U5.8 | length 4.9
  Bottom Layer w0.4: D3.2 D3.2@38.125,1.75 ; U5.8 38.725,2.35 38.549,2.174 38.453,2.078 38.253,1.878 D3.2@38.125,1.75 ; C6.2@40.752,2.046 38.676,2.046 38.58,1.95 38.325,1.95 D3.2@38.125,1.75
NetC7_1: C7.1 U10.1 | length 3.2
  Top Layer w0.4: C7.1 6.325,18.575 7.355,19.605 U10.1
NetC7_2: C7.2 L1.1 U10.3 | length 9.4
  Top Layer w0.4: L1.1 7.55,11.425 5.675,13.3 5.675,15.55 6.15,16.025 6.15,16.85 C7.2 6.365,17.065 U10.3
NetC10_2: C10.2 U10.8 | length 5.1
  Top Layer w0.4: U10.8 14.725,20.775 16.675,22.725 C10.2
NetC11_1: C11.1 R11.2 | length 2.3
  Top Layer w0.4: C11.1 19.65,17.6 R11.2
NetC11_2: C11.2 U10.6 | length 3.5
  Top Layer w0.4: U10.6 16.278,17.065 16.488,17.275 17.425,17.275 17.875,17.725 C11.2
NetC12_2: C12.2 U11.20 | length 7
  Bottom Layer w0.4: U11.20 17.775,6.26 19.06,4.975 21.566,4.975 22.125,4.416 22.125,3.3 C12.2
NetD4_1: D4.1 R9.1 | length 1.9
  Top Layer w0.4: D4.1 10.525,6.275 R9.1
NetD5_1: D5.1 R12.1 | length 3.6
  Bottom Layer w0.4: R12.1 6.275,17.4 D5.1
NetD6_1: D6.1 R14.1 | length 3.7
  Bottom Layer w0.4: R14.1 8.575,17.5 8.575,18.935 8.375,19.135 8.375,20.718 D6.1
NetD7_1: D7.1 R13.1 | length 2.3
  Bottom Layer w0.4: D7.1 28.35,24.2 R13.1
NetR1_1: R1.1 U1.7 | length 2.6
  Bottom Layer w0.4: U1.7 41.165,25.715 R1.1 R1.1@41.45,26
NetR1_2: R1.2 U2.1 | length 27.7
  Top Layer w0.4: v1(24,19.15) 25.275,19.15 U2.1
  Layer 2 w0.4: v1(24,19.15) 25,19.15 29.5,23.65 36.8,23.65 39.45,21 v1(42.475,21)
  Bottom Layer w0.4: v1(42.475,21) 43,21.525 R1.2
NetR2_1: R2.1 U3.7 | length 2.6
  Bottom Layer w0.4: U3.7 41.36,15.89 R2.1@41.575,15.675
NetR2_2: R2.2 U4.1 | length 17.8
  Top Layer w0.4: v1(39,10.5) 39,17.169 40.575,18.744 U4.1 U4.1@40.575,19.477
  Bottom Layer w0.4: v1(39,10.5) 39.038,10.538 39.548,10.538 39.71,10.7 41.366,10.7 42.1,11.434 42.1,14.45 43.225,15.575 R2.2
NetR3_1: R3.1 U1.5 | length 3.1
  Bottom Layer w0.4: U1.5 40.205,28.255 40.625,28.675 R3.1@41.55,28.675 ; R3.1@41.475,28.725 R3.1@41.7,28.5
NetR3_2: R3.2 U7.1 | length 41.3
  Top Layer w0.4: v1(24.075,8.1) 24.775,8.1 U7.1
  Layer 2 w0.4: v1(24.075,8.1) 33.975,8.1 40.7,14.825 40.7,16.575 v1(46.075,21.95) 46.075,28.766 46.191,28.766 v2(46.65,29.225)
  Bottom Layer w0.4: R3.2 46.121,28.75 46.596,29.225 v2(46.65,29.225)
NetR4_1: R4.1 U5.7 | length 2.6
  Bottom Layer w0.4: U5.7 41.06,4.79 R4.1@41.25,4.6
NetR4_2: R4.2 U6.1 | length 31.9
  Top Layer w0.4: U6.1@32.8,19.125 U6.1 34.15,19.3 v1(34.175,19.275)
  Layer 1 w0.4: v1@34.225,19.175 37.2,19.175 38.275,20.25 45.425,20.25 v1(46.075,20.9)
  Layer 2 w0.4: v1(41.975,6.3) 41.975,15.05 46.075,19.15 v1(46.075,20.9)
  Bottom Layer w0.4: v1(41.975,6.3) 42.2,6.075 42.2,5.375 R4.2
NetR5_1: R5.1 U3.5 | length 2.6
  Bottom Layer w0.4: U3.5 41.33,18.43 R5.1@41.55,18.65
NetR5_2: R5.2 U8.1 | length 17.7
  Top Layer w0.4: U8.1 40.777,7.952 40.777,9.102 41.375,9.7 43.04,9.7 43.202,9.538 44.012,9.538 v1(44.05,9.5)
  Bottom Layer w0.4: R5.2 44.875,18.575 46.375,17.075 46.375,11.825 v1(44.05,9.5)
NetR6_1: R6.1 U5.5 | length 3
  Bottom Layer w0.4: U5.5 41.1,7.33 41.5,7.73 R6.1
NetR6_2: R6.2 U9.1 | length 13.4
  Top Layer w0.4: U9.1@33.456,7.113 33.025,7.544 U9.1 33.025,8.202 33.456,8.633 33.808,8.633 35.175,10 38.42,10 38.62,9.8 39.8,9.8 v1(40,10)
  Bottom Layer w0.4: v1(40,10) 41.175,10 42.9,8.275 42.9,8.175 R6.2
NetR7_1: R7.1 U10.7 | length 3.8
  Top Layer w0.4: U10.7 16.235,18.335 17.775,19.875 R7.1
NetR8_1: R8.1 R10.2 U10.5 | length 7.3
  Top Layer w0.4: U10.5 15.98,15.795 16.275,15.5 16.275,15.1 17.85,13.525 R8.1 17.8,13.375 R10.2
PD2: R15.1 R17.1 R19.1 U11.32 | length 22.4
  Layer 2 w0.4: v1(5.563,5.897) 5.563,13.613 7.2,15.25 v1(11.325,15.25)
  Bottom Layer w0.4: v1(5.563,5.897) 6.472,5.897 R19.1 ; R19.1@6.175,6 R15.1@10.575,6 ; v1(11.325,15.25) 12.7,15.25 13.113,14.837 13.113,14.062 U11.32
PWM: P1.2 U11.16 | length 7.5
  Bottom Layer w0.4: U11.16 21.856,8.45 21.925,8.381 21.925,7.575 25.082,4.418 25.482,4.418 26.225,3.675 P1.2
RESET: C14.2 R25.1 U11.29 | length 13.2
  Layer 2 w0.4: v1(13.68,16.446) 13.68,13.03 15.022,11.688 15.212,11.688 v1(15.25,11.65)
  Bottom Layer w0.4: U11.29 v1(15.25,11.65) ; v1(13.68,16.446) 13.7,16.466 R25.1 16.048,19.4 C14.2
RX: P2.4 U11.30 | length 17.2
  Layer 2 w0.4: v1(14.275,24.4) 15.05,23.625 15.05,15 16.534,13.516 16.534,13.216 15.807,12.488 15.288,12.488 v1(15.25,12.45)
  Bottom Layer w0.4: U11.30 v1(15.25,12.45) ; v1(14.275,24.4) P2.4
TX: P2.3 U11.31 | length 15.7
  Layer 2 w0.4: v1(12.825,24.425) 14.38,22.87 14.38,14.145 v1(15.275,13.25)
  Bottom Layer w0.4: P2.3 12.775,24.475 v1(12.825,24.425) ; U11.31 v1(15.275,13.25)
VCC: C1.2 C2.2 C3.2 C8.2 D1.1 D2.1 D3.1 pad.@3.4,27.5 R7.2 U1.1 U2.4 U3.1 U4.4 U5.1 U6.4 U10.2 | length 128.3
  Top Layer w0.4: U10.2 9.61,18.335 v1(10.05,18.775) ; 9.925,27.6 10,27.525 C8.2 10,21.925 11.175,20.75 v1(11.175,20.7) ; R7.2 20.65,19.975 23.975,23.3 23.975,27.375 24.2,27.6
  Top Layer w4: v1(2.5,27.6) v1(3.5,27.6) v1(4.5,27.6) v1(5.5,27.6) 9.925,27.6 24.2,27.6 U4.4@43.975,27.6 ; U4.4@42.986,25.477 U4.4@42.986,25.858
  Layer 2 w0.4: v1(23.225,22.475) 23.225,22.45 20.225,19.45 20.225,7.625 22.4,5.45 v1(25.25,5.45)
  Bottom Layer w0.4: v1(10.05,18.775) 11.175,19.9 v1(11.175,20.7) ; v1(25.25,5.45) 26.981,5.45 28.306,4.125 C3.2 30.9,3.95 32.1,3.95 32.53,3.52 U5.1 U5.1@33.16,3.52 ; C2.2 30.845,14.62 U3.1@33.365,14.62 ; C1.2 32.425,24.975 32.727,24.673 32.727,24.56 32.843,24.445 U1.1 33.365,24.445 33.48,24.33 33.48,23.52 34.575,22.425 D1.1 34.675,20.5 35.963,19.212 35.963,16.683 33.9,14.62 U3.1 U3.1@33.365,14.62 ; D3.1 34.225,1.75 33.275,2.7 33.275,3.405 U5.1@33.16,3.52 ; U5.1@33.16,3.52 33.575,3.52 36.225,6.17 36.225,8.15 35.575,8.8 34.325,8.8 33.25,9.875 D2.1 33.25,14.505 U3.1@33.365,14.62
  other v1: 1.5,26.4 2.5,26.4 3.5,26.4 4.5,26.4 5.5,26.4 1.5,27.6 1.5,28.8 2.5,28.8 3.5,28.8 4.5,28.8 5.5,28.8
X1: R24.1 U11.7 X1.1 | length 9
  Bottom Layer w0.4: U11.7 19.375,16.016 19.5,16.141 19.5,16.255 20.195,16.95 X1.1@24.75,16.95 ; X1.1@25.1,17 27.2,17 R24.1@27.6,16.6
X2: R24.2 U11.8 X1.3 | length 8.1
  Bottom Layer w0.4: U11.8 20.175,15.113 20.244,15.044 20.631,15.044 20.825,14.85 23.3,14.85 23.55,14.6 24.75,14.6 27.4,14.6 R24.2@27.6,14.8
pads on no net: BUZ1.0 U10.9 U11.1 U11.2 U11.9 U11.17 U11.19 U11.22
copper on no net:
  other v1: 11.35,16.6 12.45,16.6 11.35,17.7 12.45,17.7 11.35,18.8 12.45,18.8

## Polygon pours and split planes (outlines as drawn)
no net on Layer 1 "NONET_L02_P005" (solid, remove dead copper, pour order 5): 18.75,14.25
no net on Layer 1 "NONET_L02_P004" (solid, remove dead copper, pour order 4): 19.25,14
no net on Layer 1 "NONET_L02_P003" (solid, remove dead copper, pour order 3): 17.75,14.75
no net on Layer 1 "NONET_L02_P002" (solid, remove dead copper, pour order 2): 19.75,15.25
GND on Top Layer "GND_L01_P001" (solid, remove dead copper, pour order 1): 5.225,25.015 23.525,25.015 23.575,24.965 23.55,24.94 23.55,3.73 5.175,3.73 5.175,25.09
GND on Bottom Layer "GND_L04_P008" (solid, remove dead copper, pour order 8): 45.575,29.1 45.575,0.95 7.775,1.05 7.775,2.5 7.775,29.1 44.975,29.1

## Keep-outs
Keep-Out Layer:
  lines w0.2: 48.5,12.5 50.5,12.5 ; 48.5,17.5 50.5,17.5 ; 49,12.5 48.27,12.5 ccw(c48.27,11.23) 47,11.23 47,10.5 47,7 47,6.27 ccw(c48.27,6.27) 48.27,5 49,5 50,5 50.73,5 cw(c50.73,3.73) 52,3.73 52,3 52,2 52,1.27 cw(c50.73,1.27) 50.73,0 50,0 2,0 1.27,0 cw(c1.27,1.27) 0,1.27 0,2 0,3 0,3.73 cw(c1.27,3.73) 1.27,5 2,5 3,5 3.73,5 ccw(c3.73,6.27) 5,6.27 5,7 5,23 5,23.73 ccw(c3.73,23.73) 3.73,25 3,25 2,25 1.27,25 cw(c1.27,26.27) 0,26.27 0,27 0,28 0,28.73 cw(c1.27,28.73) 1.27,30 2,30 50,30 50.73,30 cw(c50.73,28.73) 52,28.73 52,28 52,27 52,26.27 cw(c50.73,26.27) 50.73,25 50,25 49,25 48.27,25 ccw(c48.27,23.73) 47,23.73 47,18.77 ccw(c48.27,18.77) 48.27,17.5 49,17.5 ; 50,12.5 50.73,12.5 ccw(c50.73,13.77) 52,13.77 52,14.5 ; 50,17.5 50.73,17.5 cw(c50.73,16.23) 52,16.23 52,15.5 ; 52,14 52,16

## Other copper
Top Layer:
  rectangle net FAZ_2: 42.875,12.95 51.175,17.075
  rectangle net FAZ_2: 43.3,12.325 45.875,20.2
  rectangle net FAZ_3: 35.675,12.425 38.25,20.3
  rectangle net FAZ_1: 28.05,12.475 30.625,20.35
  rectangle net GND: 1,0.5 45.65,4.5
  rectangle net GND: 43.15,0.575 45.65,8.675
  rectangle net GND: 35.775,0.775 38.275,8.875
  rectangle net GND: 27.95,0.675 30.45,8.775
Layer 1:
  region net FAZ_1: 25.25,12.5 ccw(c26.75,12.5) 26.75,11 29,11 ccw(c29,12.25) 30.25,12.25 30.25,23.75 cw(c32,23.75) 32,25.5 50.25,25.5 ccw(c50.25,26.5) 51.25,26.5 51.25,28.25 ccw(c50.5,28.25) 50.5,29 26.5,29 ccw(c26.5,27.75) 25.25,27.75
  region net FAZ_3: 34.5,14.5 36.83,14.5 cw(c36.79,14.54) 36.75,14.5 cw(c36.79,13.047) 38.244,13.087 38.244,6.823 38.259,6.823 38.259,6.515 ccw(c40.27,6.515) 40.27,4.504 49.5,4.504 49.981,4.5 cw(c49.981,2.989) 51.492,2.989 51.492,1.992 cw(c50.25,1.992) 50.25,0.75 35.25,0.75 cw(c35.25,2.75) 33.25,2.75 33.25,13.25 cw(c34.5,13.25)
  region: 19,15
  region: 19,15

## Silkscreen, mask and mechanical layers (free items; w line width, h text height)
Top Overlay:
  text "++" at 7.429,27 h1 r90
  text "FAZ_1" at 47.097,26.25 h1 r90
  text "FAZ_2" at 47.097,13.475 h1 r90
  text "--" at 6.942,2.225 h1 r90
  text "FAZ_3" at 47.097,1.025 h1 r90
Bottom Overlay:
  text "FAZ_1" at 46.838,28.582 h1 r90
  text "TX" at 11.65,27.825 h1 r270
  text "RX" at 14,27.825 h1 r270
  text "+5V" at 9.375,27.7 h1 r270
  text "DTR" at 10.95,27.525 h1 r270
  text "GND" at 15.55,27.475 h1 r270
  text "++" at 7.404,27 h1 r90
  text "FAZ_2" at 46.838,16.057 h1 r90
  text "FAZ_3" at 46.838,3.707 h1 r90
  text "--" at 6.917,2.225 h1 r90
  text "+5V" at 24.992,1.875 h0.7 r90
  text "PWM" at 26.5,1.85 h0.7 r90
  text "GND" at 28.1,1.775 h0.7 r90
Top Solder:
  rectangle: 28,0.675 30.5,8.775
  rectangle: 35.875,0.875 38.375,8.975
  rectangle: 43.2,0.525 45.7,8.625
  rectangle: 1.5,0.5 45.1,4.5
  lines w4: 3.4,27.5 9.975,27.5 44.125,27.5